# Altium PCB PCB方案验证板  12V5A 60Wascii2.PcbDoc (part 1 of 2)
Units mm, origin at the board's own origin, x right, y up, seen from the top; angles counter-clockwise.
Board outline 99 x 45 mm, 2 copper layers (Top Layer, Bottom Layer); 59 components, 34 nets, 205 pads, 4 vias.
Unrouted connection lines stored in the file: 2.
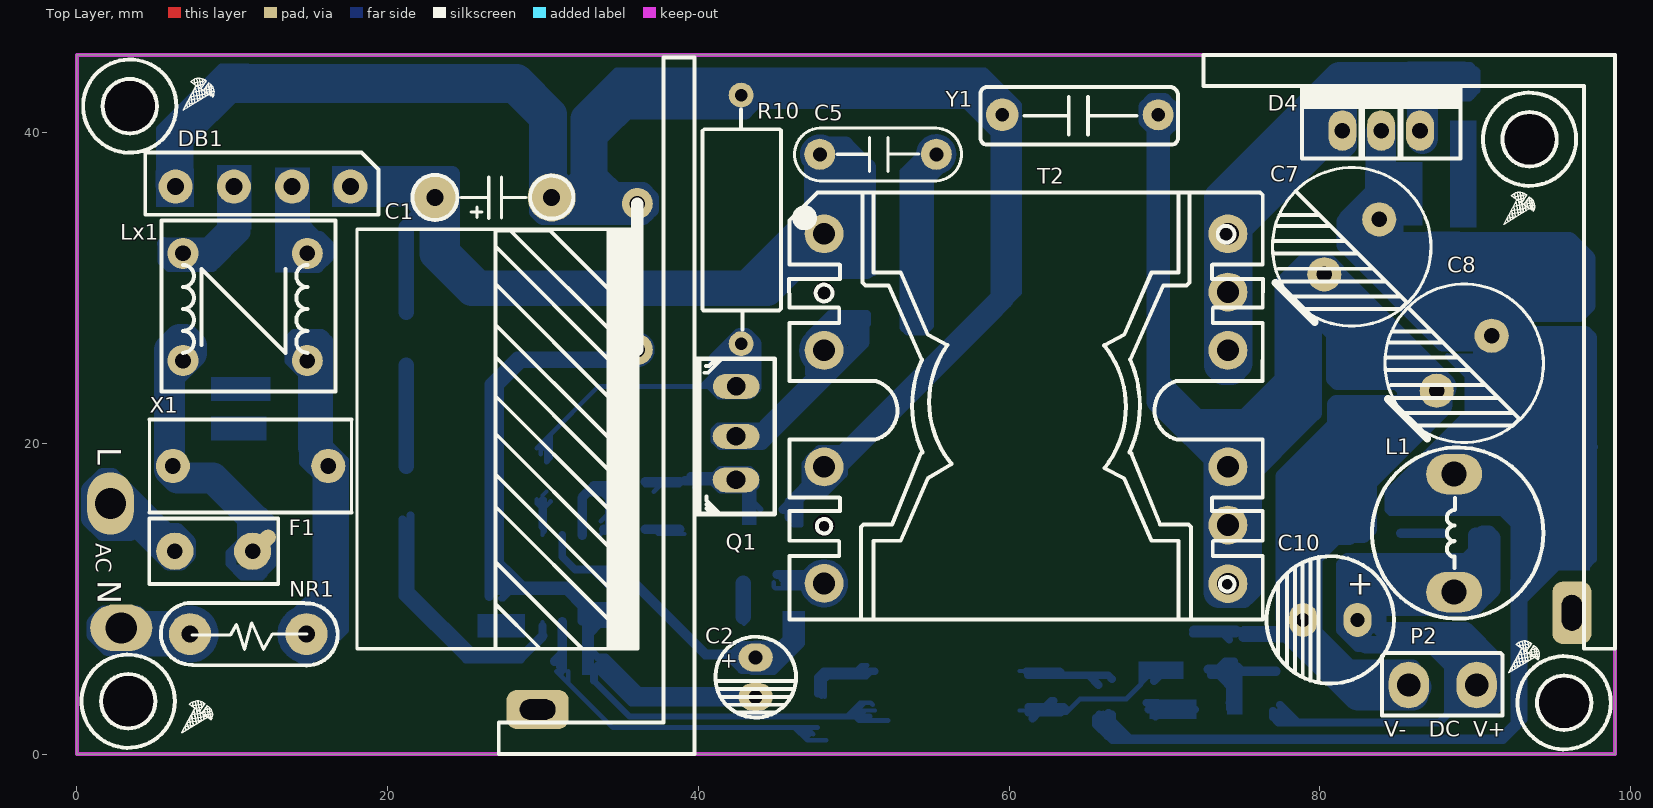
[diagram p0: Top Layer view]
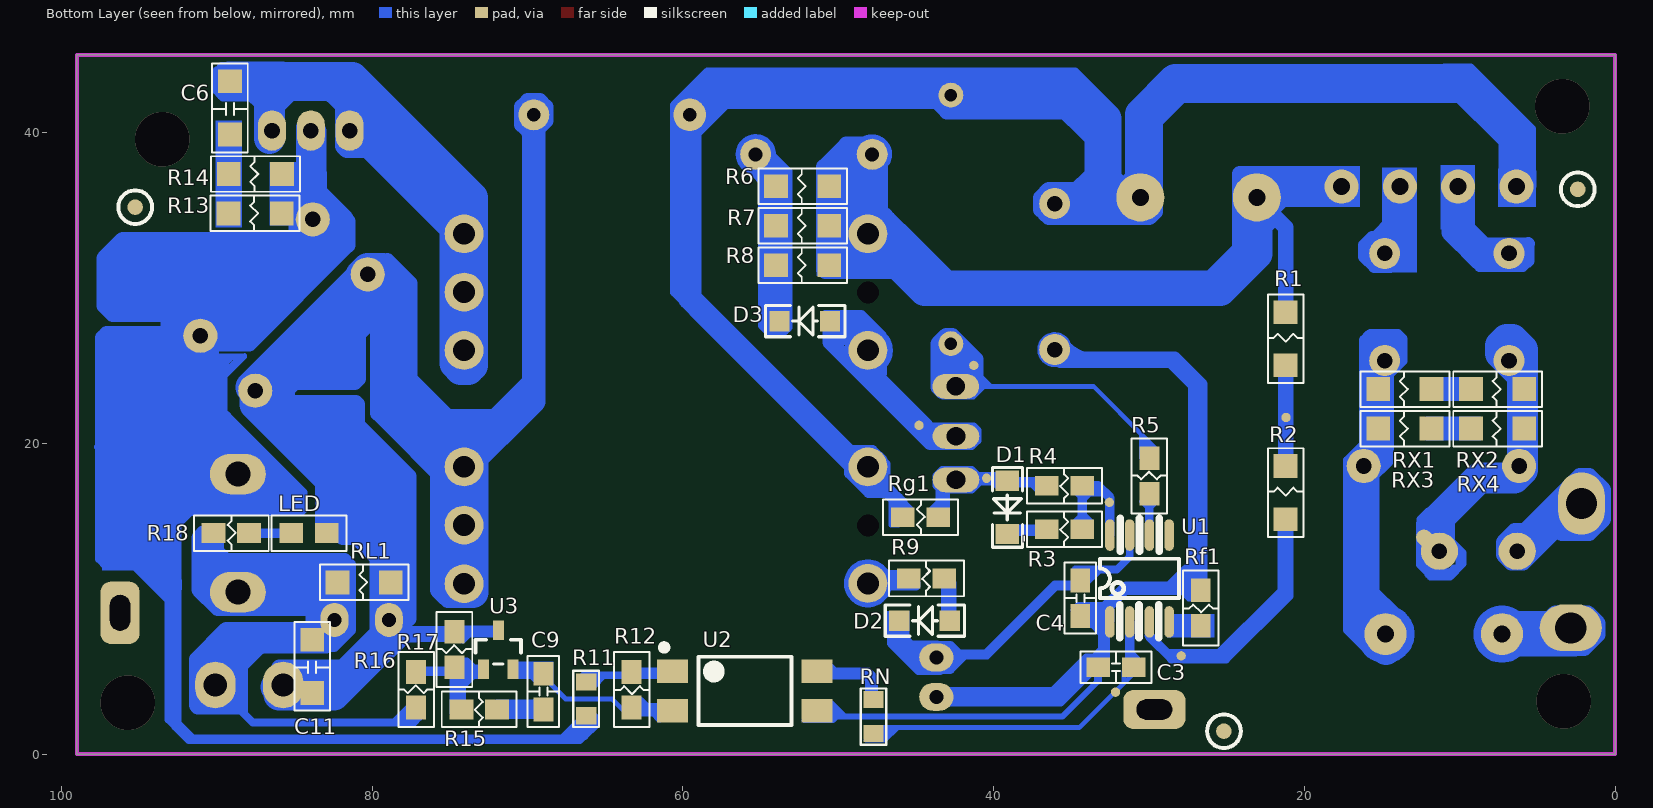
[diagram p1: Bottom Layer view, seen from below]

## Layer stack, top to bottom
Top Solder: solder mask 0.0102, Solder Resist, Dk 3.5
Top Layer: signal copper 0.0356
Dielectric1: dielectric 0.32, FR-4, Dk 4.8
Bottom Layer: signal copper 0.0356
Bottom Solder: solder mask 0.0102, Solder Resist, Dk 3.5

## Board outline
0,0 99,0 99,45 0,45

## Design rules (kind name [scope] priority, off if disabled: settings)
AssemblyTestPointUsage [All] p0: scope1count=1 scope1_0_kind=Board scope1_0_value=Board scope2count=1 scope2_0_kind=Board scope2_0_value=Board commentlength=0
AssemblyTestpoint [All] p0: scope1count=1 scope1_0_kind=Board scope1_0_value=Board scope2count=1 scope2_0_kind=Board scope2_0_value=Board commentlength=0
Clearance [All] p0: scope1count=1 scope1_0_kind=Board scope1_0_value=Board scope2count=1 scope2_0_kind=Board scope2_0_value=Board commentlength=0 gap=0.254
Clearance [All] p1: gap=0.254 ignorepadtopadclearanceinfootprint=FALSE except(0: Arc-Hole Track-Hole SMDPad-Hole THPad-Hole Via-Hole Fill-Hole Poly-Hole Region-Hole Text-Hole)
ComponentClearance [All] p0: scope1count=1 scope1_0_kind=Board scope1_0_value=Board scope2count=1 scope2_0_kind=Board scope2_0_value=Board commentlength=0 gap=0.254 collisioncheckmode=3
DiffPairsRouting [All] p0: scope1count=1 scope1_0_kind=Board scope1_0_value=Board scope2count=1 scope2_0_kind=Board scope2_0_value=Board commentlength=0
FabricationTestPointUsage [All] p0: scope1count=1 scope1_0_kind=Board scope1_0_value=Board scope2count=1 scope2_0_kind=Board scope2_0_value=Board commentlength=0 valid=0 allowmultiple=FALSE
FabricationTestpoint [All] p0 off: scope1count=1 scope1_0_kind=Board scope1_0_value=Board scope2count=1 scope2_0_kind=Board scope2_0_value=Board commentlength=80 side=3 testpointundercomponent=TRUE minsize=1.016 maxsize=2.54 preferedsize=1.524 minholesize=0 maxholesize=1.016 preferedholesize=0.813 testpointgrid=0.025 // Protel DXP Scope 1 Expression Was: (IsPad And (OnTopLayer Or OnBottomLayer))
FabricationTestpoint [(IsPad And (OnTopLayer Or OnBottomLayer))] p1: side=3 testpointundercomponent=TRUE minsize=1.016 maxsize=2.54 preferedsize=1.524 minholesize=0 maxholesize=1.016 preferedholesize=0.813 testpointgrid=0.025 allowsidetop=TRUE allowsidebottom=TRUE usegrid=TRUE gridtolerance=0
FanoutControl Fanout_BGA [All] p0 off: scope1count=1 scope1_0_kind=Board scope1_0_value=Board scope2count=1 scope2_0_kind=Board scope2_0_value=Board commentlength=69 // Protel DXP Scope 1 Expression Was: IsBGA   Fanout_BGA (Default Rule)
FanoutControl Fanout_LCC [All] p0 off: scope1count=1 scope1_0_kind=Board scope1_0_value=Board scope2count=1 scope2_0_kind=Board scope2_0_value=Board commentlength=69 // Protel DXP Scope 1 Expression Was: IsLCC   Fanout_LCC (Default Rule)
FanoutControl Fanout_SOIC [All] p0 off: scope1count=1 scope1_0_kind=Board scope1_0_value=Board scope2count=1 scope2_0_kind=Board scope2_0_value=Board commentlength=71 // Protel DXP Scope 1 Expression Was: IsSOIC   Fanout_SOIC (Default Rule)
FanoutControl Fanout_Small [All] p0 off: scope1count=1 scope1_0_kind=Board scope1_0_value=Board scope2count=1 scope2_0_kind=Board scope2_0_value=Board commentlength=84 // Protel DXP Scope 1 Expression Was: (CompPinCount < 5)   Fanout_Small (Default Rule)
FanoutControl Fanout_Default [All] p0: scope1count=1 scope1_0_kind=Board scope1_0_value=Board scope2count=1 scope2_0_kind=Board scope2_0_value=Board commentlength=30 // Fanout_Default (Default Rule)
Height [All] p0: scope1count=1 scope1_0_kind=Board scope1_0_value=Board scope2count=1 scope2_0_kind=Board scope2_0_value=Board commentlength=0
HoleSize [All] p0: scope1count=1 scope1_0_kind=Board scope1_0_value=Board scope2count=1 scope2_0_kind=Board scope2_0_value=Board commentlength=0 absolutevalues=TRUE maxlimit=2.54 minlimit=0.025 maxpercent=80.000 minpercent=20.000
HoleToHoleClearance [All] p0: scope1count=1 scope1_0_kind=Board scope1_0_value=Board scope2count=1 scope2_0_kind=Board scope2_0_value=Board commentlength=0
LayerPairs [All] p0: scope1count=1 scope1_0_kind=Board scope1_0_value=Board scope2count=1 scope2_0_kind=Board scope2_0_value=Board commentlength=0 enforce=TRUE
MinimumSolderMaskSliver [All] p0: scope1count=1 scope1_0_kind=Board scope1_0_value=Board scope2count=1 scope2_0_kind=Board scope2_0_value=Board commentlength=0
NetAntennae [All] p0: scope1count=1 scope1_0_kind=Board scope1_0_value=Board scope2count=1 scope2_0_kind=Board scope2_0_value=Board commentlength=0
PasteMaskExpansion [All] p0: scope1count=1 scope1_0_kind=Board scope1_0_value=Board scope2count=1 scope2_0_kind=Board scope2_0_value=Board commentlength=0 expansion=0
PlaneClearance [All] p0: scope1count=1 scope1_0_kind=Board scope1_0_value=Board scope2count=1 scope2_0_kind=Board scope2_0_value=Board commentlength=0 clearance=0.508
PlaneConnect [All] p0: scope1count=1 scope1_0_kind=Board scope1_0_value=Board scope2count=1 scope2_0_kind=Board scope2_0_value=Board commentlength=0 planeconnectstyle=Relief reliefexpansion=0.508 reliefentries=4 reliefconductorwidth=0.254 reliefairgap=0.254
PolygonConnect [All] p0: scope1count=1 scope1_0_kind=Board scope1_0_value=Board scope2count=1 scope2_0_kind=Board scope2_0_value=Board commentlength=0 connectstyle=Relief reliefconductorwidth=0.254 reliefentries=4 polygonreliefangle="90 Angle"
PolygonConnect [All] p1: connectstyle=Relief reliefconductorwidth=0.254 reliefentries=4 polygonreliefangle="90 Angle" airgapwidth=0.254
RoutingCorners [All] p0: scope1count=1 scope1_0_kind=Board scope1_0_value=Board scope2count=1 scope2_0_kind=Board scope2_0_value=Board commentlength=0 cornerstyle=45-Degree minsetback=2.54 maxsetback=2.54
RoutingLayers [All] p0: scope1count=1 scope1_0_kind=Board scope1_0_value=Board scope2count=1 scope2_0_kind=Board scope2_0_value=Board commentlength=0 top layer=Automatic bottom layer=Automatic
RoutingLayers [All] p1: top layer_v5=FALSE bottom layer_v5=TRUE
RoutingPriority [All] p0: scope1count=1 scope1_0_kind=Board scope1_0_value=Board scope2count=1 scope2_0_kind=Board scope2_0_value=Board commentlength=0
RoutingTopology [All] p0: scope1count=1 scope1_0_kind=Board scope1_0_value=Board scope2count=1 scope2_0_kind=Board scope2_0_value=Board commentlength=0 topology=Shortest
RoutingVias [All] p0: scope1count=1 scope1_0_kind=Board scope1_0_value=Board scope2count=1 scope2_0_kind=Board scope2_0_value=Board commentlength=0 holewidth=0.711 width=1.27 viastyle="Through Hole" minholewidth=0.711 minwidth=1.27 maxholewidth=0.711 maxwidth=1.27
RoutingVias [All] p1: holewidth=0.711 width=1.27 viastyle="Through Hole" minholewidth=0.711 minwidth=1.27 maxholewidth=0.711 maxwidth=1.27
ShortCircuit [All] p0: scope1count=1 scope1_0_kind=Board scope1_0_value=Board scope2count=1 scope2_0_kind=Board scope2_0_value=Board commentlength=0 allowed=FALSE
SilkToBoardRegionClearance [All] p0: scope1count=1 scope1_0_kind=Board scope1_0_value=Board scope2count=1 scope2_0_kind=Board scope2_0_value=Board commentlength=0
SilkToSilkClearance [All] p0: scope1count=1 scope1_0_kind=Board scope1_0_value=Board scope2count=1 scope2_0_kind=Board scope2_0_value=Board commentlength=0
SilkToSolderMaskClearance [All] p0 off: scope1count=1 scope1_0_kind=Board scope1_0_value=Board scope2count=1 scope2_0_kind=Board scope2_0_value=Board commentlength=44 // Protel DXP Scope 1 Expression Was: IsPad
SolderMaskExpansion [All] p0: scope1count=1 scope1_0_kind=Board scope1_0_value=Board scope2count=1 scope2_0_kind=Board scope2_0_value=Board commentlength=0 expansion=0.102
SolderMaskExpansion [All] p1: expansion=0.102 istentingtop=FALSE
UnRoutedNet [All] p0: scope1count=1 scope1_0_kind=Board scope1_0_value=Board scope2count=1 scope2_0_kind=Board scope2_0_value=Board commentlength=0
UnpouredPolygon [All] p0: scope1count=1 scope1_0_kind=Board scope1_0_value=Board scope2count=1 scope2_0_kind=Board scope2_0_value=Board commentlength=0
Width [All] p0: scope1count=1 scope1_0_kind=Board scope1_0_value=Board scope2count=1 scope2_0_kind=Board scope2_0_value=Board commentlength=0 maxlimit=5 minlimit=0.254 preferedwidth=1
Width [All] p1: maxlimit=5 minlimit=0.254 preferedwidth=1
28 further rules are at their usual default settings.

## Classes and differential pairs
component class "12V5A TWO": C1 C2 C3 C4 C5 C7 C8 C9 C10 C11 D1 D2 D3 D4 DB1 F1 NR1 P2 Q1 R1 R2 R3 R4 R5 R6 R7 R8 R9 R10 R11 R12 R13 R14 R15 R16 R17 R18 Rf1 Rg1 RL1 RX1 RX2 RX3 RX4 U1 U2 U3 X1 Y1

## Components (designator, comment, footprint, x,y, rotation, side; value= is the part's Value field where it differs from the comment)
C1 "100uf" "Cin /400V/56uF Wo" 18.034,33.782 r0 top
C2 "47uF/50V" "C Φ5*11 L=2.5" 43.688,4.953 r270 top
C3 "103/0805" 0805-C 33.276,5.576 r180 bottom
C4 "104/0805" 0805-C 34.429,11.178 r270 bottom
C5 "630V222" CBB=7.5MM 51.562,38.608 r0 top
C6 "472" 1206-C 89.162,43.309 r270 bottom
C7 "1000uF/16V" "C 1000UF/16V" 91.059,26.924 r225 top
C8 "1000uF/16V" "C 1000UF/16V" 83.82,34.417 r225 top
C9 "104/0805" 0805-C 68.987,5.163 r270 bottom
C10 "470uF/25V" "C= 3.5MM 8*15" 78.923,8.636 r90 top locked
C11 "104" 1206-C 83.875,7.366 r270 bottom
D1 "1N4148" "D 1N4148" 39.116,15.875 r90 bottom
D2 "FR104" D/SOD123 42.825,8.585 r0 bottom
D3 "FR107" D/SOD123 50.527,27.864 r0 bottom
D4 "MBR20100" "D TO-220" 83.947,40.132 r0 top
DB1 "KBP307" "DB D=1.1MM" 11.975,36.525 r0 top
F1 "250V/3.15A" "F 3.15A L=5MM" 8.816,13.006 r0 top
L1 "4uH" L=7.6MM 88.646,14.224 r90 top locked
LED "Comment" PCBComponent_1 84.184,15.062 r0 bottom
Lx1 "18mH" LF=6.9MM 10.825,28.778 r0 top (schematic designator T1)
NR1 "8D-11" NTC=7.5mm 14.775,7.722 r90 top
P2 "12V5A" OUT 90.094,4.496 r270 top
Q1 "SJMN60R38F" MOSFET1 42.418,17.653 r90 top
R1 "750K/1206" 1206-R 21.197,25.017 r90 bottom
R2 "750K/1206" 1206-R 21.197,15.111 r90 bottom
R3 "22R/0805" 0805-R 36.576,14.478 r180 bottom
R4 "47R/0805" 0805-R 36.576,17.272 r180 bottom
R5 "100R/0805" 0805-R 29.972,19.05 r270 bottom
R6 "50K/2510/1W" 1206-R 50.569,34.022 r0 bottom
R7 "50K/2510/1W" 1206-R 50.569,31.482 r0 bottom
R8 "50K/2510/1W" 1206-R 50.569,36.562 r0 bottom
R9 "22R/0805" 0805-R 45.466,11.303 r180 bottom
R10 "0.39/2W" "R  2W" 42.75,34.417 r90 top
R11 "1K/0805" "0805 RC" 66.225,3.556 r270 bottom
R12 "1k/0805" 0805-R 63.3,3.002 r90 bottom
R13 "51R/1206" 1206-R 85.819,34.81 r0 bottom
R14 "22R/1206" 1206-R 85.798,37.35 r0 bottom
R15 "2.2K/0805" 0805-R 74.25,2.875 r180 bottom
R16 "39K/1%/0805" 0805-R 77.175,5.288 r270 bottom
R17 "12.5K/1%/0805" 0805-R 74.7,7.874 r270 bottom
R18 "5.1K/0805" 0805-R 87.925,14.224 r0 bottom
Rf1 "Res1" 0805-R 26.67,8.255 r90 bottom
Rg1 "10K/0805" 0805-R 43.561,15.24 r0 bottom
RL1 "3.3K/1206" 1206-R 78.794,11.061 r0 bottom
RN "1K/0805" "0805 RC" 47.725,2.413 r270 bottom (schematic designator R11)
RX1 "1M/1206*4" 1206-R 5.84,20.967 r0 bottom
RX2 "1M/1206" 1206-R 5.84,23.507 r0 bottom
RX3 "1M/1206" 1206-R 11.809,20.967 r0 bottom
RX4 "1M/1206" 1206-R 11.809,23.507 r0 bottom
T2 "PQ2620" "T PQ2620" 66.548,16.764 r0 top locked
U1 "OB2269CP" OB2269 32.512,8.509 r90 bottom
U2 "PC817B" LC-SMD-4 56.007,4.064 r180 bottom
U3 "TL431" LC-SOT-23(SOT-23-3) 71.875,6.711 r180 bottom
X1 "224" CX=10mm 11.176,18.542 r180 top
Y1 "222" Y1 59.563,41.148 r0 top
? "Comment" lUOSI 7.725,2.413 r225 top
? "Comment" lUOSI 7.825,42.494 r225 top
? "Comment" lUOSI 93.125,6.274 r225 top
? "Comment" lUOSI 92.825,35.154 r225 top

## Footprints (in the part's own frame and the unit in brackets; to place one, negate y for a bottom-side part, rotate by r counter-clockwise, add the part's x,y. Pads: shape width x height; smd on the part's side, far side on the other; paste and mask are expansions set on the pad)
"0805 RC" [mm]
  rect 1.1x1.3 smd: 1(-1.088,0) 2(1.088,0)
  silkscreen extent -1.81,-0.82 1.81,0.82
0805-C [mil]
  rect 60x50 smd: 1(0.08,0.45) 2(90.08,0.45)
  silkscreen extent -45,-40 135,40
0805-R [mil]
  rect 60x50 smd: 1(0,0) 2(90,0)
  silkscreen extent -50,-45 140,45
1206-C [mil]
  rect 60x60 smd: 1(0.08,0.45) 2(135.08,0.45)
  silkscreen extent -45,-45 180,45
1206-R [mil]
  rect 60x60 smd: 1(0.08,0.45) 2(135.08,0.45)
  silkscreen extent -45,-45 180,45
"C 1000UF/16V" [mm]
  round 2.2 hole 1: 1(5,0) 2(0,0)
  silkscreen extent -2.6,-5.1 7.6,5.1
"C Φ5*11 L=2.5" [mm]
  oval 1.8x2.2 hole 0.9: 1(-1.27,0) 2(1.27,0)
  silkscreen extent -2.6,-2.6 2.6,2.6
"C= 3.5MM 8*15" [mm]
  oval 2.2x1.8 hole 0.9: 1(0,-3.5) 2(0,0)
  silkscreen extent -4.1,-5.85 4.1,2.35
CBB=7.5MM [mm]
  round 2 hole 0.9: 1(-3.75,0) 2(3.75,0)
  silkscreen extent -5.37,-1.71 5.37,1.7
"Cin /400V/56uF Wo" [mm]
  round 3.1 hole 1.1: 1(5.02,2.05) 2(12.52,2.05)
  silkscreen extent 0,-27 18.08,3.5
CX=10mm [mm]
  round 2.2 hole 1: 1(5,0) 2(-5,0)
  silkscreen extent -6.5,-3 6.5,3
"D 1N4148" [mm]
  rect 1.3x1.5 smd: +(1.713,0) -(-1.713,0)
  silkscreen extent -2.56,-0.96 2.56,0.95
"D TO-220" [mm]
  oval 1.8x2.6 hole 1: 1(-2.5,0) 1(2.5,0) 2(0,0)
  silkscreen extent -5.1,-1.8 5.1,2.7
D/SOD123 [mm]
  rect 1.3x1.3 smd: 1(0,0) 2(3.248,0)
  silkscreen extent -0.95,-1 4.15,1
"DB D=1.1MM" [mm]
  round 2.2 hole 1.1: +(5.625,0) -(-5.625,0) L(-1.875,0) N(1.875,0)
  silkscreen extent -7.58,-1.81 7.42,2.19
"F 3.15A L=5MM" [mm]
  round 2.4 hole 1: 1(-2.512,0.05) 2(2.487,0.05)
  round 0 all layers, no hole: ""(-3.063,-0.525)
  oval 1x2.2 all layers, no hole rot 135: ""(3.063,0.525)
  silkscreen extent -4.16,-2.05 4.14,2.15
L=7.6MM [mm]
  oval 2.6x3.6 hole 1.6: 1(3.8,0) 2(-3.8,0)
  silkscreen extent -5.51,-5.74 5.51,5.28
LC-SMD-4 [mm]
  rect 2x1.5 smd: A(-4.65,1.27) C(4.65,1.27) E(4.65,-1.27) K(-4.65,-1.27)
  silkscreen extent -5.4,-2.2 3,3
LC-SOT-23(SOT-23-3) [mm]
  rect 0.7x1.25 smd: A(0,1.25) K(0.95,-1.25) R(-0.95,-1.25)
  Mechanical 13 keep-out region: 36.491,13.28 26.432,13.28 26.432,14.261 36.491,14.261
  silkscreen extent -1.46,-0.9 1.46,0.65
LF=6.9MM [mm]
  round 2 hole 1: 1(4,-3.45) 2(4,3.45) 3(-4,-3.45) 4(-4,3.45)
  silkscreen extent -5.38,-5.45 5.81,5.56
lUOSI [mm]
  silkscreen extent -0.98,-0.9 1.42,0.79
MOSFET1 [mm]
  oval 1.6x3 hole 1.2: D(2.799,-0.005) G(0,0) S(6.012,-0.02)
  silkscreen extent -2.2,-2.51 7.8,2.49
NTC=7.5mm [mm]
  round 2.7 hole 1.1: 1(0,0) 2(0,7.5)
  silkscreen extent -2.02,-2.01 2.02,9.38
OB2269 [mil]
  oval 80x24 smd: 1(0,0) 2(0,-50) 3(0,-100) 4(0,-150) 5(220,-150) 6(220,-100) 7(220,-50) 8(220,0)
  silkscreen extent -40,-175 262,25
OUT [mm]
  oval 3x2.6 hole 1.5: GND(0.051,-4.369) VCC(0.051,0)
  silkscreen extent -2.01,-6.1 2.01,1.65
PCBComponent_1 [mil]
  rect 60x50 smd: 1(-50,33) 2(40,33)
  silkscreen extent -100,-12 90,78
"R  2W" [mm]
  round 1.6 hole 0.8: 1(8,0) 2(-8,0)
  silkscreen extent -7.09,-2.57 7.06,2.5
"T PQ2620" [mm]
  round 2.5 hole 1.4: 1(-18.461,16.724) 3(-18.461,9.223) 4(-18.461,1.723) 6(-18.461,-5.776) 7(7.539,-5.801) 8(7.539,-2.026) 9(7.539,1.724) 10(7.539,9.224) 11(7.539,12.973) 12(7.539,16.724)
  round 0 hole 1.4: 2(-18.461,12.949) 5(-18.461,-2.052)
  silkscreen extent -20.71,-8.11 9.78,19.39
Y1 [mm]
  round 2.1 hole 0.85: 1(0,0)
  round 2 hole 0.85: 2(10.033,0)
  silkscreen extent -1.4,-1.91 11.3,1.79

## Part data
C1 C2 C7 C8 C10: library part "Cap Pol2", "Polarized Capacitor (Axial)"
C3 C4 C5 C6 C9 C11 X1 Y1: library part Cap, "Capacitor"
D1 D2 D3 D4: library part "Diode BAS116", "Silicon Low Leakage Diode"
DB1: library part Bridge1, "Full Wave Diode Bridge"
F1: library part "Fuse 2", "Fuse"
L1: library part Inductor, "Inductor"
Lx1: library part "Trans Ideal", "Transformer (Ideal)"
NR1: library part NTC
P2: library part "Header 2", "Header, 2-Pin"
Q1: library part NMOS-2, "N-Channel Power MOSFET"
R1 R2 R3 R4 R5 R6 R7 R8 R9 R10 R11 R12 R13 R14 R15 R16 R17 R18 Rg1 RL1 RN RX1 RX2 RX3 RX4: library part Res1, "Resistor"
Rf1: "Resistor"
T2: library part T
U2: library part Optoisolator1, "4-Pin Phototransistor Optocoupler"

## Free pads (board coordinates)
  oval 3x4 hole 2: 1(2.159,16.129)
  oval 4x3 hole 2: 1(2.85,8.128)
  round 2 hole 1: 2(36.068,35.433) 3(36.068,26.035)
  round 1 smd far side: 6(2.4,36.347) 6(25.175,1.473) 6(95.25,35.204)
  round 0.6 smd far side: 6(21.175,21.666) 6(27.925,6.325) 6(32.15,3.988) 6(32.55,16.205) 6(40.45,17.755) 6(41.275,25.019) 6(44.8,21.158)
  rrect50% 4x2.5 hole 1.3 slot 2.3 at 0 deg: 126(29.65,2.87)
  rrect50% 2.5x4 hole 1.3 slot 2.3 at 90 deg: 126(96.225,9.093)
  oct 2x1 on Bottom Solder rot 45: ""(78.923,14.274) ""(78.927,16.231) ""(80.698,16.078) ""(80.727,17.984) ""(82.398,17.856) ""(82.452,19.863) ""(84.148,19.608) ""(84.327,21.819) ""(85.848,21.412) ""(91.548,18.034) ""(92.927,16.79)
  oct 2x1 on Bottom Solder rot 135: ""(79.65,7.163) ""(80.65,6.147) ""(81.598,5.175) ""(81.75,27.229) ""(82.025,29.108) ""(82.648,4.159) ""(83.575,25.375) ""(83.775,27.407) ""(83.8,32.029) ""(85.3,32.487) ""(85.3,23.825) ""(85.492,30.438) ""(85.725,25.578) ""(87.183,28.846) ""(87.225,30.658) ""(87.225,32.36) ""(88.875,27.254) ""(88.925,30.658) ""(89.148,7.207) ""(89.225,28.753) ""(90.048,6.318) ""(90.75,29.108) ""(92.625,27.988) ""(93.35,25.931)
  oct 2x1 on Bottom Solder: ""(84.271,9.792) ""(84.554,11.798) ""(85.45,7.595) ""(86.304,9.74) ""(86.704,11.823) ""(86.825,7.595) ""(88.05,7.595) ""(90.711,16.287)
  oct 1x2 on Bottom Solder: ""(90.59,19.942) ""(90.59,22.292) ""(90.59,24.641) ""(92.235,22.349) ""(92.235,24.787) ""(92.285,20.088) ""(93.896,19.058) ""(93.946,21.522) ""(93.946,23.858)

## Via types
v1: diameter 3.5, hole 3.5, Top Layer to Bottom Layer, 4 vias

## Nets (pads, with @x,y where several pads share a name; then routed paths per layer and width w, separated by ;. In a path a pad name is that pad's centre, name@x,y a point inside that pad or via, vN(x,y) a via of type N, cw(c..) or ccw(c..) an arc to the next point about the centre after c; other vN are vias at no path point)
GND: C7.1 C8.1 C10.2 C11.2 LED.1 P2.GND R17.1 RL1.1 T2.7 T2.8 T2.9 U3.A Y1.2 | length 98.9
  Bottom Layer w0.254: Y1.2@69.596,41.148 69.596,22.979 T2.9@73.85,18.725 ; T2.7@73.787,11.137 T2.8@73.787,14.738 ; T2.8@74.087,14.738 T2.8@73.787,14.738 ; C10.2@78.74,7.747 C10.2@78.74,8.453 ; RL1.1@78.74,10.541 C10.2@78.74,8.453 ; 79.685,7.747 80.574,6.858 80.645,6.858 83.693,3.81 P2.GND@85.979,3.81 ; T2.8@73.787,14.738 73.787,18.662 T2.9@73.85,18.725 ; T2.9@73.85,18.725 T2.9@74.087,18.488 74.479,18.488 78.725,22.734 78.725,29.322 C8.1@80.284,30.881 87.523,23.642 C7.1@87.523,23.388 78.923,14.788 78.923,14.224 C10.2@78.923,8.636 C10.2@78.74,8.453
  Bottom Layer w0.6: U3.A@71.875,7.961 74.613,7.961 R17.1@74.7,7.874 76.767,7.874 77.148,7.493 79.225,7.493 ; 78.923,14.224 LED.1@82.914,14.224
GND1: C1.2 C2.2 C3.1 C4.2 DB1.- pad.2 R10.1 Rf1.2 Rg1.2 T2.4 U1.1 U2.E Y1.1 | length 155.7
  Bottom Layer w0.254: Rf1.2@26.924,10.541 31.496,10.541 ; C1.2@30.734,36.068 C1.2@31.242,36.576 ; C1.2@30.861,36.957 C1.2@31.242,36.576 ; U1.1@32.512,8.562 U1.1@32.512,8.509 ; C4.2@34.417,8.89 34.036,8.509 U1.1@32.512,8.509 ; C2.2@43.688,3.683 35.179,3.683 C3.1@33.274,5.588 ; Rg1.2@45.847,15.24 45.847,16.247 T2.4@48.087,18.487 49.602,18.487 59.436,28.321 59.436,42.037 58.547,42.926 34.544,42.926 32.131,40.513 32.131,37.465 C1.2@31.242,36.576 ; U2.E@51.357,2.794 50.231,2.794 49.85,2.413 35.579,2.413 33.274,4.718 C3.1@33.274,5.588 ; U1.1@32.512,8.509 32.775,8.246 32.775,6.087 C3.1@33.274,5.588
  Bottom Layer w0.6: 31.496,10.795 32.512,9.779 32.512,9.525 U1.1@32.512,8.562
  Bottom Layer w1: 32.258,34.544 pad.2@36.461,34.544
  Bottom Layer w2: DB1.-@6.283,37.211 6.283,39.43 10.287,43.434 28.321,43.434 30.554,41.201 C1.2@30.554,35.832 35.669,35.832 pad.2@36.068,35.433
NetC1_1: C1.1 C5.1 DB1.+ R1.2 R6.1 R7.1 R8.1 T2.1 | length 82.9
  Bottom Layer w0.254: R1.2@21.209,28.448 21.209,33.987 22.757,35.536 C1.1@23.054,35.239
  Bottom Layer w0.5: 25.175,30.861 44.2,30.861
  Bottom Layer w1: C5.1@47.812,38.608 C5.1@48.363,38.057 ; T2.1@48.087,33.488 49.657,33.488 49.711,33.542 ; 50.546,33.147 R6.1@50.546,34.376 ; C5.1@48.363,38.057 cw(c47.812,38.608) 48.591,38.608 cw(c47.812,38.608) C5.1@48.363,38.057 ; C5.1@48.363,38.057 50.546,35.874 R6.1@50.546,34.376 ; 49.711,33.542 cw(c48.087,33.488) 49.712,33.488 cw(c48.087,33.488) 46.938,32.338 cw(c48.087,33.488) 49.711,33.542 ; 49.711,33.542 R6.1@50.546,34.376
  Bottom Layer w2: C1.1@23.054,35.832 23.054,35.239 23.054,32.191 25.4,29.845 44.444,29.845 46.938,32.338 T2.1@48.087,33.488
NetC2_1: C2.1 C4.1 D2.2 U1.7 | length 20.7
  Bottom Layer w0.254: C4.1@34.417,11.176 34.925,10.668 35.941,10.668 40.386,6.223 C2.1@43.688,6.223 45.339,6.223 46.174,7.058 D2.2@46.174,8.382
  Bottom Layer w0.5: U1.7@31.242,14.097 31.242,12.7 32.067,11.874 33.718,11.874 C4.1@34.417,11.176
NetC3_2: C3.2 pad.6@32.15,3.988 RN.2 U1.2 | length 21.5
  Bottom Layer w0.254: C3.2@30.988,5.588 31.115,5.715 31.242,5.842 U1.2@31.242,8.509
  Bottom Layer w0.3: C3.2@30.988,5.588 30.988,5.842 C3.2@31.115,5.715 ; C3.2@31.623,5.334 31.623,4.572 34.489,1.706 RN.2@47.675,1.706
NetC5_2: C5.2 D3.2 R6.2 R7.2 R8.2 | length 15
  Bottom Layer w0.254: 53.975,28.829 53.975,30.607 ; R7.2@53.975,31.115 53.975,31.471 53.975,35.687 ; C5.2@55.312,38.608 C5.2@55.439,38.735
  Bottom Layer w1: C5.2@54.75,38.046 ccw(c55.312,38.608) 56.107,38.608 ccw(c55.312,38.608) C5.2@54.75,38.046
  Bottom Layer w1.5: 53.975,35.687 53.975,37.271 54.75,38.046 C5.2@55.312,38.608
NetC6_1: C6.1 D4.1 T2.10 T2.11 T2.12 | length 30.2
  Bottom Layer w0.254: T2.10@73.787,26.162 T2.12@73.787,33.662 ; T2.12@74.087,33.488 74.087,37.003 77.216,40.132 D4.1@81.447,40.132 81.447,42.077 82.931,43.561 85.725,43.561 86.447,42.839 D4.1@86.447,40.132
NetC6_2: C6.2 R13.2 R14.2
NetC7_2: C7.2 C8.2 D4.2 L1.1 R11.2 R13.1 R14.1 | length 384.4
  Bottom Layer w0.254: D4.2@83.185,40.132 83.45,39.867 83.82,39.497 83.82,35.91 83.82,35.791 83.82,35.179 83.185,34.544 83.693,34.544 C8.2@83.82,34.417 ; R14.1@85.281,37.084 85.535,37.338 R14.1@85.8,37.338 ; R13.1@85.531,34.508 R13.1@85.821,34.798 ; L1.1@88.646,18.024 90.805,20.183 ; L1.1@88.983,18.024 91.059,20.1 91.059,21.04 91.059,22.447 91.059,24.187 91.059,24.764 91.059,25.597 91.059,25.799 91.059,25.845 C7.2@91.059,26.924 ; 89.35,27.305 89.575,27.53 89.604,27.559 90.1,27.559 C7.2@90.275,27.559
  Bottom Layer w0.3: R11.2@66.05,2.667 66.05,2.041 67.075,1.016 ; 91.45,16.764 91.45,16.469 92.425,15.494 92.425,15.935 92.25,16.11 ; 92.05,16.764 92.25,16.564 92.25,16.11 ; 92.25,15.748 92.25,15.751 ; 92.4,17.399 92.525,17.274 92.525,16.764 92.525,15.084 ; 92.825,16.891 92.825,16.764 92.825,16.06 ; 92.85,14.759 92.825,14.784 92.825,15.539 ; 93.275,16.51 92.825,16.06 ; 93.65,16.637 92.825,15.812 ; 94.05,16.764 92.825,15.539 ; 92.25,15.751 92.25,16.11 ; 92.25,15.751 91.491,16.51 91.85,16.51 92.25,16.11 ; 92.7,15.687 92.825,15.812 ; 92.7,15.687 92.7,15.935 92.825,16.06 ; 92.7,15.687 92.7,15.494 92.78,15.494 92.825,15.539 ; 92.825,15.539 92.825,15.812 ; 92.825,15.812 92.825,16.06
  Bottom Layer w0.5: 67.075,1.016 91.548,1.016 92.525,1.993 92.525,15.084 ; L1.1@88.646,18.024 88.983,18.024 89.585,18.024 89.671,17.938 90.845,16.764 92.525,15.084 ; 89.35,27.305 89.35,26.544 89.478,26.416 ; 90.1,27.813 90.1,27.559 90.1,26.556 90.1,26.416 90.1,25.794 ; 90.65,23.749 90.425,23.974 90.1,24.299 90.1,24.84 90.1,24.859 90.1,24.886 90.1,25.794 ; 90.875,25.019 90.577,25.317 90.567,25.327 90.554,25.34 90.1,25.794 ; 92.4,28.829 92.4,28.554 92.4,28.321 92.4,27.141 92.49,27.051 92.617,26.924 92.7,26.841 ; 92.55,26.035 92.7,26.185 92.7,26.312 92.7,26.541 92.7,26.841 ; 92.7,29.337 92.7,28.554 92.7,28.321 92.7,27.051 92.7,26.924 92.7,26.841 ; 92.825,14.784 92.525,15.084 ; 92.85,14.759 93.625,13.984 ; 93.125,26.416 92.7,26.841
  Bottom Layer w1: 83.067,33.274 82.6,33.741 82.4,33.941 82.4,34.49 82.4,34.777 83.45,35.827 83.45,36.068 ; D4.2@83.45,40.132 83.45,39.867 83.45,36.068 ; 83.5,36.068 83.45,36.068 ; D4.2@83.947,40.132 83.947,34.42 C8.2@83.95,34.417 ; 83.975,35.796 83.975,36.195 ; 84,33.117 84.65,33.117 ; 84.1,36.092 84.1,36.703 ; C8.2@84.4,34.671 D4.2@84.4,40.386 ; 84.65,36.449 84.65,33.117 ; 84.75,32.893 84.65,32.993 84.65,33.117 ; 85.85,32.893 86.638,32.893 90.575,28.956 ; 86.025,32.639 86.025,32.625 90.075,28.575 ; 86.925,33.147 88.892,33.147 88.922,33.117 ; 87,16.764 90.845,16.764 91.45,16.764 92.05,16.764 92.525,16.764 92.825,16.764 94.05,16.764 ; 89.575,27.94 89.575,27.813 89.575,27.53 89.575,27.081 90.1,26.556 C7.2@90.24,26.416 ; 89.8,20.193 89.8,21.188 89.8,24.586 90.1,24.886 90.554,25.34 90.925,25.711 ; 89.875,19.685 89.875,19.856 89.875,20.955 ; 90.075,19.558 90.075,20.056 90.075,21.155 ; 90.25,33.02 90.25,32.404 93.825,28.829 ; 90.35,21.43 90.075,21.155 ; C7.2@90.525,27.559 90.767,27.559 C7.2@91.453,27.559 ; C7.2@90.7,26.416 C7.2@90.24,26.416 ; 90.825,20.806 90.425,21.206 90.425,21.813 90.425,23.974 90.425,24.13 91.059,24.764 91.476,25.181 ; 90.875,24.003 91.059,24.187 91.764,24.892 ; C7.2@90.925,26.416 90.925,25.731 ; 91.025,32.639 91.267,32.639 94.95,28.956 ; 91.059,25.799 90.958,25.698 ; C7.2@91.059,26.924 91.151,26.924 91.275,27.048 C7.2@91.278,27.051 ; C7.2@91.275,27.051 C7.2@91.278,27.051 ; C7.2@91.525,26.416 91.525,26.311 91.059,25.845 90.935,25.721 ; 91.65,28.702 91.65,27.861 ; C7.2@91.73,27.559 C7.2@91.682,27.559 ; 92,25.781 92,25.705 91.476,25.181 ; 92,28.321 92.11,28.321 ; 92.025,24.892 91.764,24.892 ; 92.825,26.416 92.7,26.541 92.317,26.924 ; 92.85,26.162 92.7,26.312 C7.2@92.088,26.924 ; 93.35,32.766 93.35,32.393 96.025,29.718 ; 94.05,32.893 94.05,32.678 96.375,30.353 ; 94.575,20.066 94.65,20.141 94.65,26.162 ; 94.775,32.766 94.903,32.766 96.3,31.369 ; 95.65,20.302 95.65,25.958 94.684,26.924 ; 96.25,19.635 96.25,26.626 95.952,26.924 94.684,26.924 ; 97.325,17.907 97.325,26.797 97.071,27.051 92.7,27.051 92.49,27.051 92.19,27.051 ; 83.45,36.068 83.332,36.068 81.575,34.311 81.575,32.766 87.925,26.416 89.478,26.416 90.1,26.416 C7.2@90.24,26.416 ; 84.65,33.117 87.503,33.117 ; 87.503,33.117 88.922,33.117 ; 87.503,33.117 91.2,29.42 ; 88.922,33.117 92.35,29.689 92.35,28.554 ; 88.922,33.117 91.762,33.117 ; 89.875,20.955 90.075,21.155 ; 89.875,20.955 89.875,21.263 89.875,24.634 90.1,24.859 90.567,25.327 90.925,25.684 90.925,25.711 ; 90.075,21.155 90.075,21.463 90.075,24.815 90.1,24.84 90.577,25.317 90.958,25.698 ; C7.2@90.24,26.416 90.925,25.731 ; 90.925,25.711 90.925,25.731 ; 90.925,25.711 90.935,25.721 ; 90.925,25.731 90.935,25.721 ; 90.935,25.721 90.958,25.698 ; 90.958,25.698 91.059,25.597 91.476,25.181 ; 91.2,29.42 91.475,29.145 ; 91.2,29.42 91.2,27.812 C7.2@91.453,27.559 ; C7.2@91.278,27.051 C7.2@91.475,27.051 ; C7.2@91.278,27.051 C7.2@91.475,27.248 ; C7.2@91.453,27.559 C7.2@91.475,27.537 ; C7.2@91.453,27.559 C7.2@91.475,27.559 ; 91.476,25.181 91.764,24.892 ; C7.2@91.475,27.051 C7.2@91.961,27.051 ; C7.2@91.475,27.051 C7.2@91.475,27.248 ; C7.2@91.475,27.051 91.475,26.924 C7.2@92.088,26.924 ; C7.2@91.475,27.248 C7.2@91.475,27.537 ; C7.2@91.475,27.248 C7.2@91.619,27.393 ; C7.2@91.475,27.537 C7.2@91.475,27.559 ; C7.2@91.475,27.537 C7.2@91.619,27.393 ; C7.2@91.475,27.559 C7.2@91.475,27.686 ; C7.2@91.475,27.559 C7.2@91.682,27.559 ; C7.2@91.475,27.686 91.65,27.861 ; C7.2@91.475,27.686 91.475,29.145 ; 91.475,29.145 92.205,28.416 ; C7.2@91.619,27.393 C7.2@91.961,27.051 ; C7.2@91.619,27.393 C7.2@91.734,27.507 ; 91.65,27.861 92.11,28.321 ; 91.65,27.861 91.65,27.591 C7.2@91.682,27.559 ; C7.2@91.682,27.559 C7.2@91.734,27.507 ; C7.2@91.734,27.507 92.19,27.051 ; C7.2@91.734,27.507 92.35,28.123 92.35,28.27 ; 91.762,33.117 91.9,33.117 ; 91.762,33.117 96.325,28.554 92.7,28.554 92.4,28.554 92.35,28.554 ; 91.9,33.117 95.26,33.117 ; 91.9,33.117 96.696,28.321 ; C7.2@91.961,27.051 92.19,27.051 ; C7.2@91.961,27.051 C7.2@92.088,26.924 ; C7.2@92.088,26.924 92.317,26.924 ; 92.11,28.321 92.205,28.416 ; 92.11,28.321 92.299,28.321 ; 92.19,27.051 92.317,26.924 ; 92.205,28.416 92.343,28.554 92.35,28.554 ; 92.205,28.416 92.299,28.321 ; 92.299,28.321 92.35,28.321 ; 92.299,28.321 92.35,28.27 ; 92.317,26.924 92.617,26.924 92.7,26.924 94.684,26.924 ; 92.35,28.27 92.35,28.321 ; 92.35,28.321 92.4,28.321 92.7,28.321 96.696,28.321 ; 92.35,28.321 92.35,28.554 ; 95.26,33.117 96.058,33.117 97.25,31.925 97.25,28.875 96.696,28.321 ; 95.26,33.117 96.696,31.681 96.696,28.321
  Bottom Layer w2: 82.15,34.24 82.4,34.49 83.82,35.91 83.9,35.99 83.9,37.338 ; 82.6,34.29 82.6,33.741 82.6,32.675 83.525,31.75 ; 82.7,34.671 83.82,35.791 83.825,35.796 ; 82.95,33.528 83.589,33.528 C8.2@83.693,33.424 ; C8.2@83.693,34.544 C8.2@83.693,33.424 ; 87.725,27.813 89.575,27.813 90.1,27.813 90.513,27.813 90.767,27.559 91.275,27.051 91.275,27.048 91.275,26.599 C7.2@91.219,26.543 ; 88.288,26.924 83.693,31.519 C8.2@83.693,33.424 ; L1.1@88.646,18.024 88.646,18.627 89.875,19.856 90.075,20.056 90.825,20.806 91.059,21.04 91.275,21.256 ; 89.05,28.067 84,33.117 C8.2@83.693,33.424 ; C7.2@90.85,27.808 C7.2@90.85,27.813 ; 92.725,23.749 92.361,23.749 91.059,22.447 90.425,21.813 90.075,21.463 89.875,21.263 89.8,21.188 86.9,18.288 86.9,17.551 87.179,17.272 89.006,17.272 89.671,17.938 92.75,21.016 92.75,25.908 ; 93.675,19.883 93.675,26.294
NetC9_1: C9.1 R12.1 U2.K U3.K | length 11.5
  Bottom Layer w0.254: U2.K@60.657,2.794 63.173,2.794 63.3,2.667 63.684,2.667 64.573,3.556 67.549,3.556 69.2,5.207 70.671,5.207 U3.K@70.925,5.461
NetC9_2: C9.2 R15.2 | length 2.8
  Bottom Layer w0.254: C9.2@69.2,2.921 R15.2@71.964,2.921
NetD1_+: D1.+ pad.6@40.45,17.755 Q1.G R4.1 Rg1.1 | length 6
  Bottom Layer w0.254: R4.1@36.576,17.272 38.8,17.272 D1.+@39.116,17.588 42.353,17.588 Q1.G@42.418,17.653
NetD1_-: D1.- R3.1 | length 2.7
  Bottom Layer w0.254: R3.1@36.576,14.478 37.084,14.478 37.4,14.162 D1.-@39.116,14.162
NetD2_1: D2.1 R9.2 | length 2.5
  Bottom Layer w0.254: D2.1@42.926,8.382 43.18,8.636 R9.2@43.18,10.795
NetD3_1: D3.1 Q1.D T2.3 | length 14.9
  Bottom Layer w0.254: Q1.D@42.423,20.452 43.312,20.452 T2.3@47.783,24.923 ; T2.3@48.087,25.987 48.651,25.987 49.099,26.436 D3.1@50.527,27.864
  Bottom Layer w1: T2.3@47.783,24.923 cw(c48.087,25.987) T2.3@49.099,26.436
NetDB1_L: DB1.N Lx1.2 | length 5.1
  Bottom Layer w1: DB1.N@13.783,37.211 13.783,33.545 Lx1.2@14.795,32.533
NetDB1_N: DB1.L Lx1.4 | length 7.3
  Bottom Layer w1: Lx1.4@6.795,32.533 8.911,32.533 10.033,33.655 DB1.L@10.033,37.211